# EAGLE board BBMiniPCB5x5-Quad (EAGLE 6.6.0)
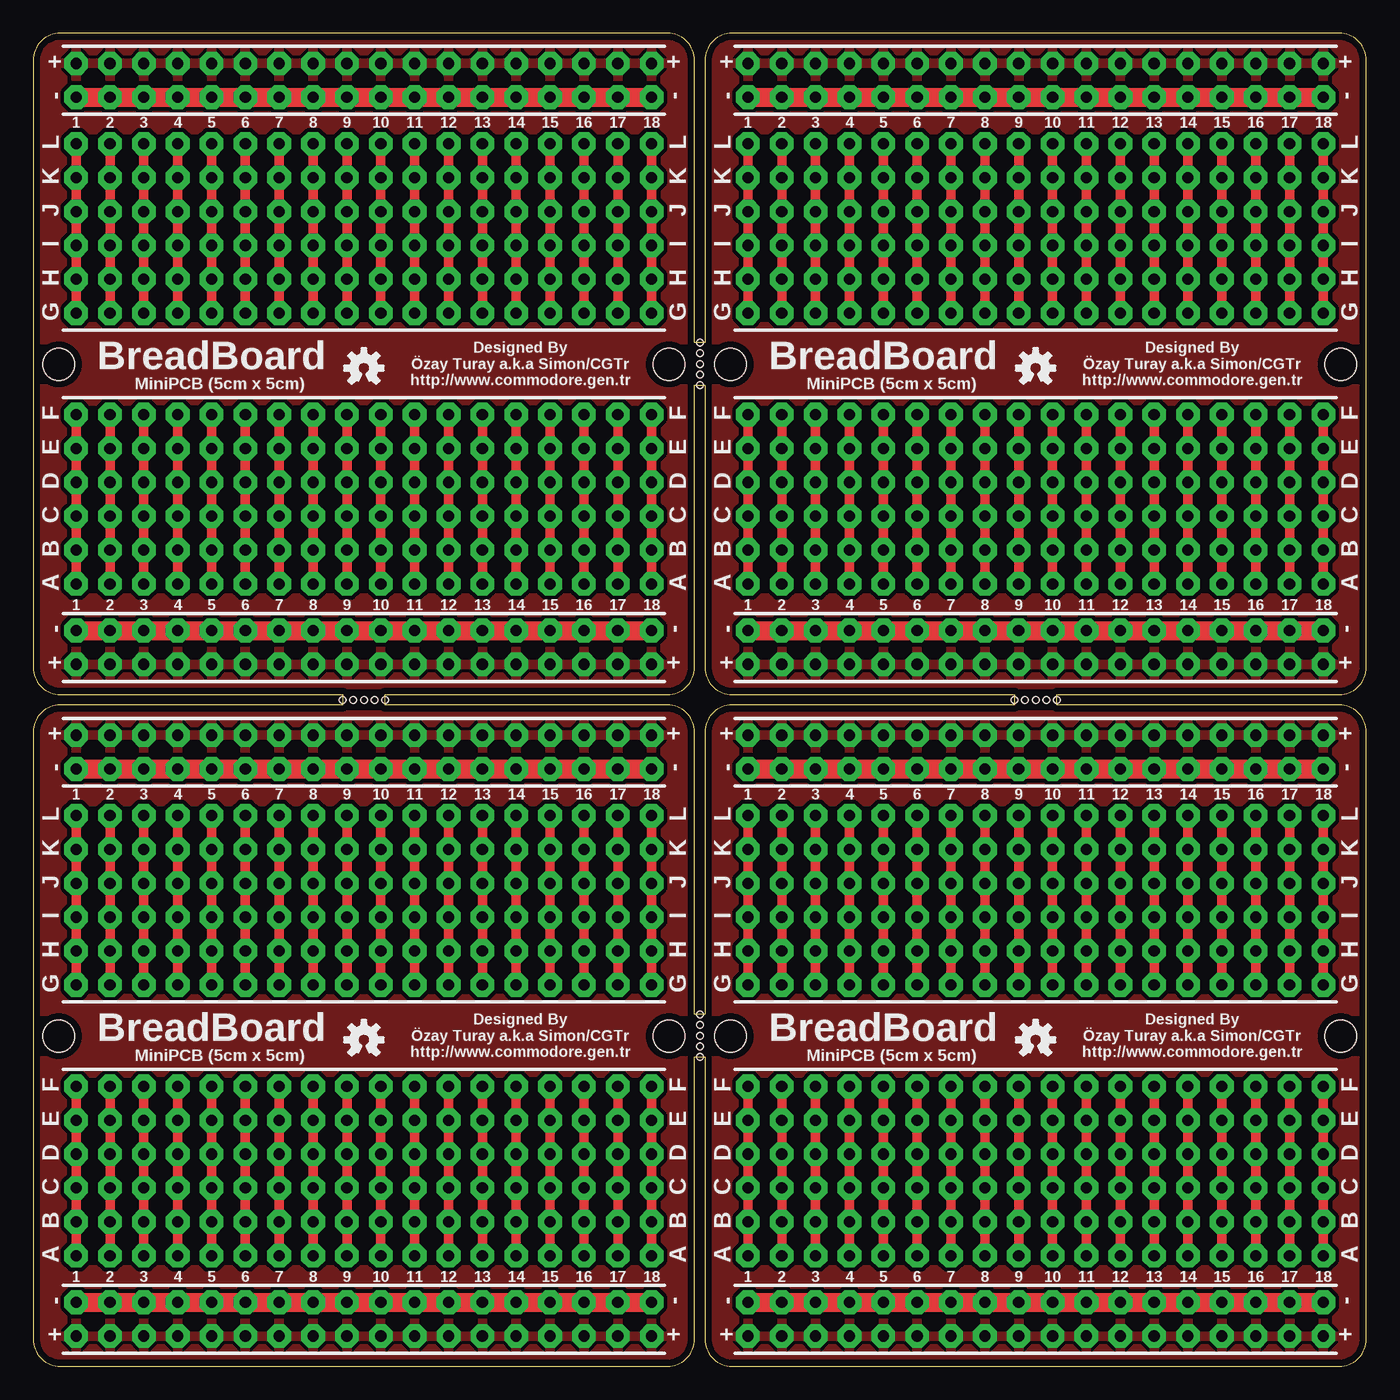
[diagram p0: board, top side]
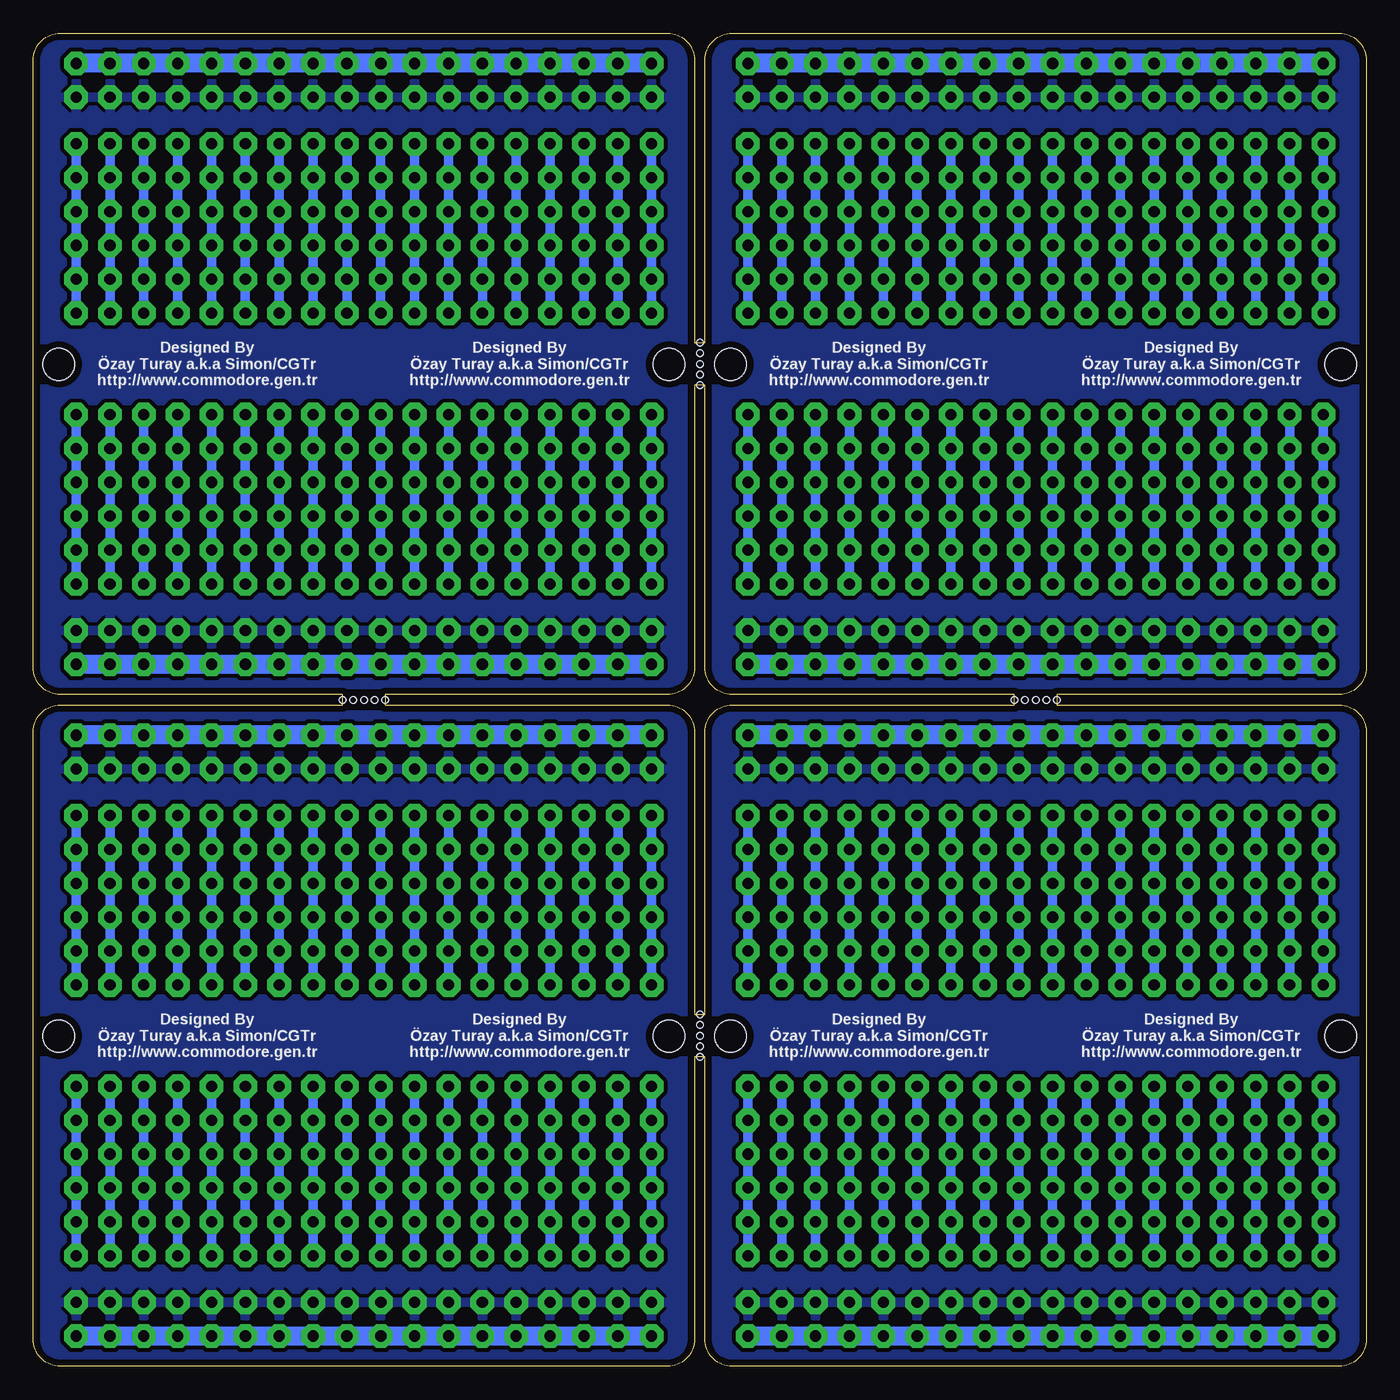
[diagram p1: board, bottom side, seen from below]

Size 100 x 100 mm. Coordinates in mm from the lower left corner, seen from the top.
Outline: 23.2,49.6 2,49.6 arc90 0,47.6 0,2 arc90 2,0 47.6,0 arc90 49.6,2 49.6,23.2 50.4,23.2 50.4,2 arc90 52.4,0 98,0 arc90 100,2 100,47.6 arc90 98,49.6 76.8,49.6 76.8,50.4 98,50.4 arc90 100,52.4 100,98 arc90 98,100 52.4,100 arc90 50.4,98 50.4,76.8 49.6,76.8 49.6,98 arc90 47.6,100 2,100 arc90 0,98 0,52.4 arc90 2,50.4 23.2,50.4 23.2,49.6
Outline: 49.6,26.4 49.6,47.6 arc90 47.6,49.6 26.4,49.6 26.4,50.4 47.6,50.4 arc90 49.6,52.4 49.6,73.6 50.4,73.6 50.4,52.4 arc90 52.4,50.4 73.6,50.4 73.6,49.6 52.4,49.6 arc90 50.4,47.6 50.4,26.4 49.6,26.4
Copper layers (1*16): Top 0.035mm / dielectric 1.6mm / Bottom 0.035mm
Design rules "Elecrow": minimum track width 6mil, minimum drill 12mil, track to track 6mil, track to pad 6mil, pad to pad 6mil, via to via 8mil, smd to smd 0mil, copper to edge 20mil, drill to drill 10mil, minimum pad ring 6mil, minimum via ring 6mil, stop-mask expansion 0mil, vias tented up to drill 100mil, thermal gap 10mil
Holes 0.5 mm at 50,26.4 23.2,50 24,50 73.6,50 50,76.8 24.8,50 25.6,50 26.4,50 50,25.6 50,24.8 50,24 50,23.2 50,76 50,75.2 50,74.4 50,73.6 74.4,50 75.2,50 76,50 76.8,50
Holes 2.4 mm at 1.91,24.77 47.7,24.77 52.3,24.77 98.09,24.77 1.91,75.17 47.7,75.17 52.3,75.17 98.09,75.17

## Footprints (pad centres in the part's own frame; a part is rotated, then mirrored left to right if it is on the bottom)
HDR_1X06_NOSILK = drill 0.838 pad 1.778 octagon: 1 0,0; 2 2.54,0; 3 5.08,0; 4 7.62,0; 5 10.16,0; 6 12.7,0
HDR_1X18_NOSILK = drill 0.838 pad 1.778 octagon: 1 0,0; 2 2.54,0; 3 5.08,0; 4 7.62,0; 5 10.16,0; 6 12.7,0; 7 15.24,0; 8 17.78,0; 9 20.32,0; 10 22.86,0; 11 25.4,0; 12 27.94,0; 13 30.48,0; 14 33.02,0; 15 35.56,0; 16 38.1,0; 17 40.64,0; 18 43.18,0

## Placement (x,y rotation side)
B1  1  [HDR_1X06_NOSILK]  3.21,8.29 90 top
B2  2  [HDR_1X06_NOSILK]  5.75,8.29 90 top
B3  3  [HDR_1X06_NOSILK]  8.29,8.29 90 top
B4  4  [HDR_1X06_NOSILK]  10.83,8.29 90 top
B5  5  [HDR_1X06_NOSILK]  13.37,8.29 90 top
B6  6  [HDR_1X06_NOSILK]  15.91,8.29 90 top
B7  7  [HDR_1X06_NOSILK]  18.45,8.29 90 top
B8  8  [HDR_1X06_NOSILK]  20.99,8.29 90 top
B9  9  [HDR_1X06_NOSILK]  23.53,8.29 90 top
B10  10  [HDR_1X06_NOSILK]  26.07,8.29 90 top
B11  11  [HDR_1X06_NOSILK]  28.61,8.29 90 top
B12  12  [HDR_1X06_NOSILK]  31.15,8.29 90 top
B13  13  [HDR_1X06_NOSILK]  33.69,8.29 90 top
B14  14  [HDR_1X06_NOSILK]  36.23,8.29 90 top
B15  15  [HDR_1X06_NOSILK]  38.77,8.29 90 top
B16  16  [HDR_1X06_NOSILK]  41.31,8.29 90 top
B17  17  [HDR_1X06_NOSILK]  43.85,8.29 90 top
B18  18  [HDR_1X06_NOSILK]  46.39,8.29 90 top
B19  1  [HDR_1X06_NOSILK]  53.61,8.29 90 top
B20  2  [HDR_1X06_NOSILK]  56.15,8.29 90 top
B21  3  [HDR_1X06_NOSILK]  58.69,8.29 90 top
B22  4  [HDR_1X06_NOSILK]  61.23,8.29 90 top
B23  5  [HDR_1X06_NOSILK]  63.77,8.29 90 top
B24  6  [HDR_1X06_NOSILK]  66.31,8.29 90 top
B25  7  [HDR_1X06_NOSILK]  68.85,8.29 90 top
B26  8  [HDR_1X06_NOSILK]  71.39,8.29 90 top
B27  9  [HDR_1X06_NOSILK]  73.93,8.29 90 top
B28  10  [HDR_1X06_NOSILK]  76.47,8.29 90 top
B29  11  [HDR_1X06_NOSILK]  79.01,8.29 90 top
B30  12  [HDR_1X06_NOSILK]  81.55,8.29 90 top
B31  13  [HDR_1X06_NOSILK]  84.09,8.29 90 top
B32  14  [HDR_1X06_NOSILK]  86.63,8.29 90 top
B33  15  [HDR_1X06_NOSILK]  89.17,8.29 90 top
B34  16  [HDR_1X06_NOSILK]  91.71,8.29 90 top
B35  17  [HDR_1X06_NOSILK]  94.25,8.29 90 top
B36  18  [HDR_1X06_NOSILK]  96.79,8.29 90 top
B37  1  [HDR_1X06_NOSILK]  3.21,58.69 90 top
B38  2  [HDR_1X06_NOSILK]  5.75,58.69 90 top
B39  3  [HDR_1X06_NOSILK]  8.29,58.69 90 top
B40  4  [HDR_1X06_NOSILK]  10.83,58.69 90 top
B41  5  [HDR_1X06_NOSILK]  13.37,58.69 90 top
B42  6  [HDR_1X06_NOSILK]  15.91,58.69 90 top
B43  7  [HDR_1X06_NOSILK]  18.45,58.69 90 top
B44  8  [HDR_1X06_NOSILK]  20.99,58.69 90 top
B45  9  [HDR_1X06_NOSILK]  23.53,58.69 90 top
B46  10  [HDR_1X06_NOSILK]  26.07,58.69 90 top
B47  11  [HDR_1X06_NOSILK]  28.61,58.69 90 top
B48  12  [HDR_1X06_NOSILK]  31.15,58.69 90 top
B49  13  [HDR_1X06_NOSILK]  33.69,58.69 90 top
B50  14  [HDR_1X06_NOSILK]  36.23,58.69 90 top
B51  15  [HDR_1X06_NOSILK]  38.77,58.69 90 top
B52  16  [HDR_1X06_NOSILK]  41.31,58.69 90 top
B53  17  [HDR_1X06_NOSILK]  43.85,58.69 90 top
B54  18  [HDR_1X06_NOSILK]  46.39,58.69 90 top
B55  1  [HDR_1X06_NOSILK]  53.61,58.69 90 top
B56  2  [HDR_1X06_NOSILK]  56.15,58.69 90 top
B57  3  [HDR_1X06_NOSILK]  58.69,58.69 90 top
B58  4  [HDR_1X06_NOSILK]  61.23,58.69 90 top
B59  5  [HDR_1X06_NOSILK]  63.77,58.69 90 top
B60  6  [HDR_1X06_NOSILK]  66.31,58.69 90 top
B61  7  [HDR_1X06_NOSILK]  68.85,58.69 90 top
B62  8  [HDR_1X06_NOSILK]  71.39,58.69 90 top
B63  9  [HDR_1X06_NOSILK]  73.93,58.69 90 top
B64  10  [HDR_1X06_NOSILK]  76.47,58.69 90 top
B65  11  [HDR_1X06_NOSILK]  79.01,58.69 90 top
B66  12  [HDR_1X06_NOSILK]  81.55,58.69 90 top
B67  13  [HDR_1X06_NOSILK]  84.09,58.69 90 top
B68  14  [HDR_1X06_NOSILK]  86.63,58.69 90 top
B69  15  [HDR_1X06_NOSILK]  89.17,58.69 90 top
B70  16  [HDR_1X06_NOSILK]  91.71,58.69 90 top
B71  17  [HDR_1X06_NOSILK]  94.25,58.69 90 top
B72  18  [HDR_1X06_NOSILK]  96.79,58.69 90 top
G1  -  [HDR_1X18_NOSILK]  3.21,4.8 0 top
G2  -  [HDR_1X18_NOSILK]  3.21,44.8 0 top
G3  -  [HDR_1X18_NOSILK]  53.61,4.8 0 top
G4  -  [HDR_1X18_NOSILK]  53.61,44.8 0 top
G5  -  [HDR_1X18_NOSILK]  3.21,55.2 0 top
G6  -  [HDR_1X18_NOSILK]  3.21,95.2 0 top
G7  -  [HDR_1X18_NOSILK]  53.61,55.2 0 top
G8  -  [HDR_1X18_NOSILK]  53.61,95.2 0 top
LOGO1  OSHW_LOGO_SMALL  [OSHW_LOGO_SMALL]  24.8,24.48 0 top
LOGO2  OSHW_LOGO_SMALL  [OSHW_LOGO_SMALL]  75.2,24.48 0 top
LOGO3  OSHW_LOGO_SMALL  [OSHW_LOGO_SMALL]  24.8,74.88 0 top
LOGO4  OSHW_LOGO_SMALL  [OSHW_LOGO_SMALL]  75.2,74.88 0 top
P1  +  [HDR_1X18_NOSILK]  3.21,2.26 0 top
P2  +  [HDR_1X18_NOSILK]  3.21,47.34 0 top
P3  +  [HDR_1X18_NOSILK]  53.61,2.26 0 top
P4  +  [HDR_1X18_NOSILK]  53.61,47.34 0 top
P5  +  [HDR_1X18_NOSILK]  3.21,52.66 0 top
P6  +  [HDR_1X18_NOSILK]  3.21,97.74 0 top
P7  +  [HDR_1X18_NOSILK]  53.61,52.66 0 top
P8  +  [HDR_1X18_NOSILK]  53.61,97.74 0 top
T1  1  [HDR_1X06_NOSILK]  3.21,41.31 270 top
T2  2  [HDR_1X06_NOSILK]  5.75,41.31 270 top
T3  3  [HDR_1X06_NOSILK]  8.29,41.31 270 top
T4  4  [HDR_1X06_NOSILK]  10.83,41.31 270 top
T5  5  [HDR_1X06_NOSILK]  13.37,41.31 270 top
T6  6  [HDR_1X06_NOSILK]  15.91,41.31 270 top
T7  7  [HDR_1X06_NOSILK]  18.45,41.31 270 top
T8  8  [HDR_1X06_NOSILK]  20.99,41.31 270 top
T9  9  [HDR_1X06_NOSILK]  23.53,41.31 270 top
T10  10  [HDR_1X06_NOSILK]  26.07,41.31 270 top
T11  11  [HDR_1X06_NOSILK]  28.61,41.31 270 top
T12  12  [HDR_1X06_NOSILK]  31.15,41.31 270 top
T13  13  [HDR_1X06_NOSILK]  33.69,41.31 270 top
T14  14  [HDR_1X06_NOSILK]  36.23,41.31 270 top
T15  15  [HDR_1X06_NOSILK]  38.77,41.31 270 top
T16  16  [HDR_1X06_NOSILK]  41.31,41.31 270 top
T17  17  [HDR_1X06_NOSILK]  43.85,41.31 270 top
T18  18  [HDR_1X06_NOSILK]  46.39,41.31 270 top
T19  1  [HDR_1X06_NOSILK]  53.61,41.31 270 top
T20  2  [HDR_1X06_NOSILK]  56.15,41.31 270 top
T21  3  [HDR_1X06_NOSILK]  58.69,41.31 270 top
T22  4  [HDR_1X06_NOSILK]  61.23,41.31 270 top
T23  5  [HDR_1X06_NOSILK]  63.77,41.31 270 top
T24  6  [HDR_1X06_NOSILK]  66.31,41.31 270 top
T25  7  [HDR_1X06_NOSILK]  68.85,41.31 270 top
T26  8  [HDR_1X06_NOSILK]  71.39,41.31 270 top
T27  9  [HDR_1X06_NOSILK]  73.93,41.31 270 top
T28  10  [HDR_1X06_NOSILK]  76.47,41.31 270 top
T29  11  [HDR_1X06_NOSILK]  79.01,41.31 270 top
T30  12  [HDR_1X06_NOSILK]  81.55,41.31 270 top
T31  13  [HDR_1X06_NOSILK]  84.09,41.31 270 top
T32  14  [HDR_1X06_NOSILK]  86.63,41.31 270 top
T33  15  [HDR_1X06_NOSILK]  89.17,41.31 270 top
T34  16  [HDR_1X06_NOSILK]  91.71,41.31 270 top
T35  17  [HDR_1X06_NOSILK]  94.25,41.31 270 top
T36  18  [HDR_1X06_NOSILK]  96.79,41.31 270 top
T37  1  [HDR_1X06_NOSILK]  3.21,91.71 270 top
T38  2  [HDR_1X06_NOSILK]  5.75,91.71 270 top
T39  3  [HDR_1X06_NOSILK]  8.29,91.71 270 top
T40  4  [HDR_1X06_NOSILK]  10.83,91.71 270 top
T41  5  [HDR_1X06_NOSILK]  13.37,91.71 270 top
T42  6  [HDR_1X06_NOSILK]  15.91,91.71 270 top
T43  7  [HDR_1X06_NOSILK]  18.45,91.71 270 top
T44  8  [HDR_1X06_NOSILK]  20.99,91.71 270 top
T45  9  [HDR_1X06_NOSILK]  23.53,91.71 270 top
T46  10  [HDR_1X06_NOSILK]  26.07,91.71 270 top
T47  11  [HDR_1X06_NOSILK]  28.61,91.71 270 top
T48  12  [HDR_1X06_NOSILK]  31.15,91.71 270 top
T49  13  [HDR_1X06_NOSILK]  33.69,91.71 270 top
T50  14  [HDR_1X06_NOSILK]  36.23,91.71 270 top
T51  15  [HDR_1X06_NOSILK]  38.77,91.71 270 top
T52  16  [HDR_1X06_NOSILK]  41.31,91.71 270 top
T53  17  [HDR_1X06_NOSILK]  43.85,91.71 270 top
T54  18  [HDR_1X06_NOSILK]  46.39,91.71 270 top
T55  1  [HDR_1X06_NOSILK]  53.61,91.71 270 top
T56  2  [HDR_1X06_NOSILK]  56.15,91.71 270 top
T57  3  [HDR_1X06_NOSILK]  58.69,91.71 270 top
T58  4  [HDR_1X06_NOSILK]  61.23,91.71 270 top
T59  5  [HDR_1X06_NOSILK]  63.77,91.71 270 top
T60  6  [HDR_1X06_NOSILK]  66.31,91.71 270 top
T61  7  [HDR_1X06_NOSILK]  68.85,91.71 270 top
T62  8  [HDR_1X06_NOSILK]  71.39,91.71 270 top
T63  9  [HDR_1X06_NOSILK]  73.93,91.71 270 top
T64  10  [HDR_1X06_NOSILK]  76.47,91.71 270 top
T65  11  [HDR_1X06_NOSILK]  79.01,91.71 270 top
T66  12  [HDR_1X06_NOSILK]  81.55,91.71 270 top
T67  13  [HDR_1X06_NOSILK]  84.09,91.71 270 top
T68  14  [HDR_1X06_NOSILK]  86.63,91.71 270 top
T69  15  [HDR_1X06_NOSILK]  89.17,91.71 270 top
T70  16  [HDR_1X06_NOSILK]  91.71,91.71 270 top
T71  17  [HDR_1X06_NOSILK]  94.25,91.71 270 top
T72  18  [HDR_1X06_NOSILK]  96.79,91.71 270 top

## Library data of the parts
B1-B72 G1-G8 P1-P8 T1-T72 = sj_connectors
LOGO1-LOGO4 = sj_standart

## Nets
B1: B1.1 B1.2 B1.3 B1.4 B1.5 B1.6
B2: B2.1 B2.2 B2.3 B2.4 B2.5 B2.6
B3: B3.1 B3.2 B3.3 B3.4 B3.5 B3.6
B4: B4.1 B4.2 B4.3 B4.4 B4.5 B4.6
B5: B5.1 B5.2 B5.3 B5.4 B5.5 B5.6
B6: B6.1 B6.2 B6.3 B6.4 B6.5 B6.6
B7: B7.1 B7.2 B7.3 B7.4 B7.5 B7.6
B8: B8.1 B8.2 B8.3 B8.4 B8.5 B8.6
B9: B9.1 B9.2 B9.3 B9.4 B9.5 B9.6
B10: B10.1 B10.2 B10.3 B10.4 B10.5 B10.6
B11: B11.1 B11.2 B11.3 B11.4 B11.5 B11.6
B12: B12.1 B12.2 B12.3 B12.4 B12.5 B12.6
B13: B13.1 B13.2 B13.3 B13.4 B13.5 B13.6
B14: B14.1 B14.2 B14.3 B14.4 B14.5 B14.6
B15: B15.1 B15.2 B15.3 B15.4 B15.5 B15.6
B16: B16.1 B16.2 B16.3 B16.4 B16.5 B16.6
B17: B17.1 B17.2 B17.3 B17.4 B17.5 B17.6
B18: B18.1 B18.2 B18.3 B18.4 B18.5 B18.6
B19: B19.1 B19.2 B19.3 B19.4 B19.5 B19.6
B20: B20.1 B20.2 B20.3 B20.4 B20.5 B20.6
B21: B21.1 B21.2 B21.3 B21.4 B21.5 B21.6
B22: B22.1 B22.2 B22.3 B22.4 B22.5 B22.6
B23: B23.1 B23.2 B23.3 B23.4 B23.5 B23.6
B24: B24.1 B24.2 B24.3 B24.4 B24.5 B24.6
B25: B25.1 B25.2 B25.3 B25.4 B25.5 B25.6
B26: B26.1 B26.2 B26.3 B26.4 B26.5 B26.6
B27: B27.1 B27.2 B27.3 B27.4 B27.5 B27.6
B28: B28.1 B28.2 B28.3 B28.4 B28.5 B28.6
B29: B29.1 B29.2 B29.3 B29.4 B29.5 B29.6
B30: B30.1 B30.2 B30.3 B30.4 B30.5 B30.6
B31: B31.1 B31.2 B31.3 B31.4 B31.5 B31.6
B32: B32.1 B32.2 B32.3 B32.4 B32.5 B32.6
B33: B33.1 B33.2 B33.3 B33.4 B33.5 B33.6
B34: B34.1 B34.2 B34.3 B34.4 B34.5 B34.6
B35: B35.1 B35.2 B35.3 B35.4 B35.5 B35.6
B36: B36.1 B36.2 B36.3 B36.4 B36.5 B36.6
B37: B37.1 B37.2 B37.3 B37.4 B37.5 B37.6
B38: B38.1 B38.2 B38.3 B38.4 B38.5 B38.6
B39: B39.1 B39.2 B39.3 B39.4 B39.5 B39.6
B40: B40.1 B40.2 B40.3 B40.4 B40.5 B40.6
B41: B41.1 B41.2 B41.3 B41.4 B41.5 B41.6
B42: B42.1 B42.2 B42.3 B42.4 B42.5 B42.6
B43: B43.1 B43.2 B43.3 B43.4 B43.5 B43.6
B44: B44.1 B44.2 B44.3 B44.4 B44.5 B44.6
B45: B45.1 B45.2 B45.3 B45.4 B45.5 B45.6
B46: B46.1 B46.2 B46.3 B46.4 B46.5 B46.6
B47: B47.1 B47.2 B47.3 B47.4 B47.5 B47.6
B48: B48.1 B48.2 B48.3 B48.4 B48.5 B48.6
B49: B49.1 B49.2 B49.3 B49.4 B49.5 B49.6
B50: B50.1 B50.2 B50.3 B50.4 B50.5 B50.6
B51: B51.1 B51.2 B51.3 B51.4 B51.5 B51.6
B52: B52.1 B52.2 B52.3 B52.4 B52.5 B52.6
B53: B53.1 B53.2 B53.3 B53.4 B53.5 B53.6
B54: B54.1 B54.2 B54.3 B54.4 B54.5 B54.6
B55: B55.1 B55.2 B55.3 B55.4 B55.5 B55.6
B56: B56.1 B56.2 B56.3 B56.4 B56.5 B56.6
B57: B57.1 B57.2 B57.3 B57.4 B57.5 B57.6
B58: B58.1 B58.2 B58.3 B58.4 B58.5 B58.6
B59: B59.1 B59.2 B59.3 B59.4 B59.5 B59.6
B60: B60.1 B60.2 B60.3 B60.4 B60.5 B60.6
B61: B61.1 B61.2 B61.3 B61.4 B61.5 B61.6
B62: B62.1 B62.2 B62.3 B62.4 B62.5 B62.6
B63: B63.1 B63.2 B63.3 B63.4 B63.5 B63.6
B64: B64.1 B64.2 B64.3 B64.4 B64.5 B64.6
B65: B65.1 B65.2 B65.3 B65.4 B65.5 B65.6
B66: B66.1 B66.2 B66.3 B66.4 B66.5 B66.6
B67: B67.1 B67.2 B67.3 B67.4 B67.5 B67.6
B68: B68.1 B68.2 B68.3 B68.4 B68.5 B68.6
B69: B69.1 B69.2 B69.3 B69.4 B69.5 B69.6
B70: B70.1 B70.2 B70.3 B70.4 B70.5 B70.6
B71: B71.1 B71.2 B71.3 B71.4 B71.5 B71.6
B72: B72.1 B72.2 B72.3 B72.4 B72.5 B72.6
GND: G1.1 G1.2 G1.3 G1.4 G1.5 G1.6 G1.7 G1.8 G1.9 G1.10 G1.11 G1.12 G1.13 G1.14 G1.15 G1.16 G1.17 G1.18 G2.1 G2.2 G2.3 G2.4 G2.5 G2.6 G2.7 G2.8 G2.9 G2.10 G2.11 G2.12 G2.13 G2.14 G2.15 G2.16 G2.17 G2.18
GND1: G3.1 G3.2 G3.3 G3.4 G3.5 G3.6 G3.7 G3.8 G3.9 G3.10 G3.11 G3.12 G3.13 G3.14 G3.15 G3.16 G3.17 G3.18 G4.1 G4.2 G4.3 G4.4 G4.5 G4.6 G4.7 G4.8 G4.9 G4.10 G4.11 G4.12 G4.13 G4.14 G4.15 G4.16 G4.17 G4.18
GND2: G5.1 G5.2 G5.3 G5.4 G5.5 G5.6 G5.7 G5.8 G5.9 G5.10 G5.11 G5.12 G5.13 G5.14 G5.15 G5.16 G5.17 G5.18 G6.1 G6.2 G6.3 G6.4 G6.5 G6.6 G6.7 G6.8 G6.9 G6.10 G6.11 G6.12 G6.13 G6.14 G6.15 G6.16 G6.17 G6.18
GND3: G7.1 G7.2 G7.3 G7.4 G7.5 G7.6 G7.7 G7.8 G7.9 G7.10 G7.11 G7.12 G7.13 G7.14 G7.15 G7.16 G7.17 G7.18 G8.1 G8.2 G8.3 G8.4 G8.5 G8.6 G8.7 G8.8 G8.9 G8.10 G8.11 G8.12 G8.13 G8.14 G8.15 G8.16 G8.17 G8.18
T1: T1.1 T1.2 T1.3 T1.4 T1.5 T1.6
T2: T2.1 T2.2 T2.3 T2.4 T2.5 T2.6
T3: T3.1 T3.2 T3.3 T3.4 T3.5 T3.6
T4: T4.1 T4.2 T4.3 T4.4 T4.5 T4.6
T5: T5.1 T5.2 T5.3 T5.4 T5.5 T5.6
T6: T6.1 T6.2 T6.3 T6.4 T6.5 T6.6
T7: T7.1 T7.2 T7.3 T7.4 T7.5 T7.6
T8: T8.1 T8.2 T8.3 T8.4 T8.5 T8.6
T9: T9.1 T9.2 T9.3 T9.4 T9.5 T9.6
T10: T10.1 T10.2 T10.3 T10.4 T10.5 T10.6
T11: T11.1 T11.2 T11.3 T11.4 T11.5 T11.6
T12: T12.1 T12.2 T12.3 T12.4 T12.5 T12.6
T13: T13.1 T13.2 T13.3 T13.4 T13.5 T13.6
T14: T14.1 T14.2 T14.3 T14.4 T14.5 T14.6
T15: T15.1 T15.2 T15.3 T15.4 T15.5 T15.6
T16: T16.1 T16.2 T16.3 T16.4 T16.5 T16.6
T17: T17.1 T17.2 T17.3 T17.4 T17.5 T17.6
T18: T18.1 T18.2 T18.3 T18.4 T18.5 T18.6
T19: T19.1 T19.2 T19.3 T19.4 T19.5 T19.6
T20: T20.1 T20.2 T20.3 T20.4 T20.5 T20.6
T21: T21.1 T21.2 T21.3 T21.4 T21.5 T21.6
T22: T22.1 T22.2 T22.3 T22.4 T22.5 T22.6
T23: T23.1 T23.2 T23.3 T23.4 T23.5 T23.6
T24: T24.1 T24.2 T24.3 T24.4 T24.5 T24.6
T25: T25.1 T25.2 T25.3 T25.4 T25.5 T25.6
T26: T26.1 T26.2 T26.3 T26.4 T26.5 T26.6
T27: T27.1 T27.2 T27.3 T27.4 T27.5 T27.6
T28: T28.1 T28.2 T28.3 T28.4 T28.5 T28.6
T29: T29.1 T29.2 T29.3 T29.4 T29.5 T29.6
T30: T30.1 T30.2 T30.3 T30.4 T30.5 T30.6
T31: T31.1 T31.2 T31.3 T31.4 T31.5 T31.6
T32: T32.1 T32.2 T32.3 T32.4 T32.5 T32.6
T33: T33.1 T33.2 T33.3 T33.4 T33.5 T33.6
T34: T34.1 T34.2 T34.3 T34.4 T34.5 T34.6
T35: T35.1 T35.2 T35.3 T35.4 T35.5 T35.6
T36: T36.1 T36.2 T36.3 T36.4 T36.5 T36.6
T37: T37.1 T37.2 T37.3 T37.4 T37.5 T37.6
T38: T38.1 T38.2 T38.3 T38.4 T38.5 T38.6
T39: T39.1 T39.2 T39.3 T39.4 T39.5 T39.6
T40: T40.1 T40.2 T40.3 T40.4 T40.5 T40.6
T41: T41.1 T41.2 T41.3 T41.4 T41.5 T41.6
T42: T42.1 T42.2 T42.3 T42.4 T42.5 T42.6
T43: T43.1 T43.2 T43.3 T43.4 T43.5 T43.6
T44: T44.1 T44.2 T44.3 T44.4 T44.5 T44.6
T45: T45.1 T45.2 T45.3 T45.4 T45.5 T45.6
T46: T46.1 T46.2 T46.3 T46.4 T46.5 T46.6
T47: T47.1 T47.2 T47.3 T47.4 T47.5 T47.6
T48: T48.1 T48.2 T48.3 T48.4 T48.5 T48.6
T49: T49.1 T49.2 T49.3 T49.4 T49.5 T49.6
T50: T50.1 T50.2 T50.3 T50.4 T50.5 T50.6
T51: T51.1 T51.2 T51.3 T51.4 T51.5 T51.6
T52: T52.1 T52.2 T52.3 T52.4 T52.5 T52.6
T53: T53.1 T53.2 T53.3 T53.4 T53.5 T53.6
T54: T54.1 T54.2 T54.3 T54.4 T54.5 T54.6
T55: T55.1 T55.2 T55.3 T55.4 T55.5 T55.6
T56: T56.1 T56.2 T56.3 T56.4 T56.5 T56.6
T57: T57.1 T57.2 T57.3 T57.4 T57.5 T57.6
T58: T58.1 T58.2 T58.3 T58.4 T58.5 T58.6
T59: T59.1 T59.2 T59.3 T59.4 T59.5 T59.6
T60: T60.1 T60.2 T60.3 T60.4 T60.5 T60.6
T61: T61.1 T61.2 T61.3 T61.4 T61.5 T61.6
T62: T62.1 T62.2 T62.3 T62.4 T62.5 T62.6
T63: T63.1 T63.2 T63.3 T63.4 T63.5 T63.6
T64: T64.1 T64.2 T64.3 T64.4 T64.5 T64.6
T65: T65.1 T65.2 T65.3 T65.4 T65.5 T65.6
T66: T66.1 T66.2 T66.3 T66.4 T66.5 T66.6
T67: T67.1 T67.2 T67.3 T67.4 T67.5 T67.6
T68: T68.1 T68.2 T68.3 T68.4 T68.5 T68.6
T69: T69.1 T69.2 T69.3 T69.4 T69.5 T69.6
T70: T70.1 T70.2 T70.3 T70.4 T70.5 T70.6
T71: T71.1 T71.2 T71.3 T71.4 T71.5 T71.6
T72: T72.1 T72.2 T72.3 T72.4 T72.5 T72.6
VCC: P1.1 P1.2 P1.3 P1.4 P1.5 P1.6 P1.7 P1.8 P1.9 P1.10 P1.11 P1.12 P1.13 P1.14 P1.15 P1.16 P1.17 P1.18 P2.1 P2.2 P2.3 P2.4 P2.5 P2.6 P2.7 P2.8 P2.9 P2.10 P2.11 P2.12 P2.13 P2.14 P2.15 P2.16 P2.17 P2.18
VCC1: P3.1 P3.2 P3.3 P3.4 P3.5 P3.6 P3.7 P3.8 P3.9 P3.10 P3.11 P3.12 P3.13 P3.14 P3.15 P3.16 P3.17 P3.18 P4.1 P4.2 P4.3 P4.4 P4.5 P4.6 P4.7 P4.8 P4.9 P4.10 P4.11 P4.12 P4.13 P4.14 P4.15 P4.16 P4.17 P4.18
VCC2: P5.1 P5.2 P5.3 P5.4 P5.5 P5.6 P5.7 P5.8 P5.9 P5.10 P5.11 P5.12 P5.13 P5.14 P5.15 P5.16 P5.17 P5.18 P6.1 P6.2 P6.3 P6.4 P6.5 P6.6 P6.7 P6.8 P6.9 P6.10 P6.11 P6.12 P6.13 P6.14 P6.15 P6.16 P6.17 P6.18
VCC3: P7.1 P7.2 P7.3 P7.4 P7.5 P7.6 P7.7 P7.8 P7.9 P7.10 P7.11 P7.12 P7.13 P7.14 P7.15 P7.16 P7.17 P7.18 P8.1 P8.2 P8.3 P8.4 P8.5 P8.6 P8.7 P8.8 P8.9 P8.10 P8.11 P8.12 P8.13 P8.14 P8.15 P8.16 P8.17 P8.18

## Tracks (layer width: path | path; a pad name or v marks a point on that pad's centre or on a via)
B1
  Top 0.711: B1.6 B1.5 B1.4 B1.3 B1.2 B1.1
  Bottom 0.711: B1.1 B1.6
B2
  Top 0.711: B2.6 B2.5 B2.4 B2.3 B2.2 B2.1
  Bottom 0.711: B2.1 B2.6
B3
  Top 0.711: B3.6 B3.5 B3.4 B3.3 B3.2 B3.1
  Bottom 0.711: B3.1 B3.6
B4
  Top 0.711: B4.6 B4.5 B4.4 B4.3 B4.2 B4.1
  Bottom 0.711: B4.1 B4.6
B5
  Top 0.711: B5.6 B5.5 B5.4 B5.3 B5.2 B5.1
  Bottom 0.711: B5.1 B5.6
B6
  Top 0.711: B6.6 B6.5 B6.4 B6.3 B6.2 B6.1
  Bottom 0.711: B6.1 B6.6
B7
  Top 0.711: B7.6 B7.5 B7.4 B7.3 B7.2 B7.1
  Bottom 0.711: B7.1 B7.6
B8
  Top 0.711: B8.6 B8.5 B8.4 B8.3 B8.2 B8.1
  Bottom 0.711: B8.1 B8.6
B9
  Top 0.711: B9.6 B9.5 B9.4 B9.3 B9.2 B9.1
  Bottom 0.711: B9.1 B9.6
B10
  Top 0.711: B10.6 B10.5 B10.4 B10.3 B10.2 B10.1
  Bottom 0.711: B10.1 B10.6
B11
  Top 0.711: B11.6 B11.5 B11.4 B11.3 B11.2 B11.1
  Bottom 0.711: B11.6 B11.1
B12
  Top 0.711: B12.6 B12.5 B12.4 B12.3 B12.2 B12.1
  Bottom 0.711: B12.6 B12.1
B13
  Top 0.711: B13.6 B13.5 B13.4 B13.3 B13.2 B13.1
  Bottom 0.711: B13.6 B13.1
B14
  Top 0.711: B14.6 B14.5 B14.4 B14.3 B14.2 B14.1
  Bottom 0.711: B14.6 B14.1
B15
  Top 0.711: B15.6 B15.5 B15.4 B15.3 B15.2 B15.1
  Bottom 0.711: B15.6 B15.1
B16
  Top 0.711: B16.6 B16.5 B16.4 B16.3 B16.2 B16.1
  Bottom 0.711: B16.6 B16.1
B17
  Top 0.711: B17.6 B17.5 B17.4 B17.3 B17.2 B17.1
  Bottom 0.711: B17.6 B17.1
B18
  Top 0.711: B18.6 B18.5 B18.4 B18.3 B18.2 B18.1
  Bottom 0.711: B18.6 B18.1
B19
  Top 0.711: B19.6 B19.5 B19.4 B19.3 B19.2 B19.1
  Bottom 0.711: B19.1 B19.6
B20
  Top 0.711: B20.6 B20.5 B20.4 B20.3 B20.2 B20.1
  Bottom 0.711: B20.1 B20.6
B21
  Top 0.711: B21.6 B21.5 B21.4 B21.3 B21.2 B21.1
  Bottom 0.711: B21.1 B21.6
B22
  Top 0.711: B22.6 B22.5 B22.4 B22.3 B22.2 B22.1
  Bottom 0.711: B22.1 B22.6
B23
  Top 0.711: B23.6 B23.5 B23.4 B23.3 B23.2 B23.1
  Bottom 0.711: B23.1 B23.6
B24
  Top 0.711: B24.6 B24.5 B24.4 B24.3 B24.2 B24.1
  Bottom 0.711: B24.1 B24.6
B25
  Top 0.711: B25.6 B25.5 B25.4 B25.3 B25.2 B25.1
  Bottom 0.711: B25.1 B25.6
B26
  Top 0.711: B26.6 B26.5 B26.4 B26.3 B26.2 B26.1
  Bottom 0.711: B26.1 B26.6
B27
  Top 0.711: B27.6 B27.5 B27.4 B27.3 B27.2 B27.1
  Bottom 0.711: B27.1 B27.6
B28
  Top 0.711: B28.6 B28.5 B28.4 B28.3 B28.2 B28.1
  Bottom 0.711: B28.1 B28.6
B29
  Top 0.711: B29.6 B29.5 B29.4 B29.3 B29.2 B29.1
  Bottom 0.711: B29.6 B29.1
B30
  Top 0.711: B30.6 B30.5 B30.4 B30.3 B30.2 B30.1
  Bottom 0.711: B30.6 B30.1
B31
  Top 0.711: B31.6 B31.5 B31.4 B31.3 B31.2 B31.1
  Bottom 0.711: B31.6 B31.1
B32
  Top 0.711: B32.6 B32.5 B32.4 B32.3 B32.2 B32.1
  Bottom 0.711: B32.6 B32.1
B33
  Top 0.711: B33.6 B33.5 B33.4 B33.3 B33.2 B33.1
  Bottom 0.711: B33.6 B33.1
B34
  Top 0.711: B34.6 B34.5 B34.4 B34.3 B34.2 B34.1
  Bottom 0.711: B34.6 B34.1
B35
  Top 0.711: B35.6 B35.5 B35.4 B35.3 B35.2 B35.1
  Bottom 0.711: B35.6 B35.1
B36
  Top 0.711: B36.6 B36.5 B36.4 B36.3 B36.2 B36.1
  Bottom 0.711: B36.6 B36.1
B37
  Top 0.711: B37.6 B37.5 B37.4 B37.3 B37.2 B37.1
  Bottom 0.711: B37.1 B37.6
B38
  Top 0.711: B38.6 B38.5 B38.4 B38.3 B38.2 B38.1
  Bottom 0.711: B38.1 B38.6
B39
  Top 0.711: B39.6 B39.5 B39.4 B39.3 B39.2 B39.1
  Bottom 0.711: B39.1 B39.6
B40
  Top 0.711: B40.6 B40.5 B40.4 B40.3 B40.2 B40.1
  Bottom 0.711: B40.1 B40.6
B41
  Top 0.711: B41.6 B41.5 B41.4 B41.3 B41.2 B41.1
  Bottom 0.711: B41.1 B41.6
B42
  Top 0.711: B42.6 B42.5 B42.4 B42.3 B42.2 B42.1
  Bottom 0.711: B42.1 B42.6
B43
  Top 0.711: B43.6 B43.5 B43.4 B43.3 B43.2 B43.1
  Bottom 0.711: B43.1 B43.6
B44
  Top 0.711: B44.6 B44.5 B44.4 B44.3 B44.2 B44.1
  Bottom 0.711: B44.1 B44.6
B45
  Top 0.711: B45.6 B45.5 B45.4 B45.3 B45.2 B45.1
  Bottom 0.711: B45.1 B45.6
B46
  Top 0.711: B46.6 B46.5 B46.4 B46.3 B46.2 B46.1
  Bottom 0.711: B46.1 B46.6
B47
  Top 0.711: B47.6 B47.5 B47.4 B47.3 B47.2 B47.1
  Bottom 0.711: B47.6 B47.1
B48
  Top 0.711: B48.6 B48.5 B48.4 B48.3 B48.2 B48.1
  Bottom 0.711: B48.6 B48.1
B49
  Top 0.711: B49.6 B49.5 B49.4 B49.3 B49.2 B49.1
  Bottom 0.711: B49.6 B49.1
B50
  Top 0.711: B50.6 B50.5 B50.4 B50.3 B50.2 B50.1
  Bottom 0.711: B50.6 B50.1
B51
  Top 0.711: B51.6 B51.5 B51.4 B51.3 B51.2 B51.1
  Bottom 0.711: B51.6 B51.1
B52
  Top 0.711: B52.6 B52.5 B52.4 B52.3 B52.2 B52.1
  Bottom 0.711: B52.6 B52.1
B53
  Top 0.711: B53.6 B53.5 B53.4 B53.3 B53.2 B53.1
  Bottom 0.711: B53.6 B53.1
B54
  Top 0.711: B54.6 B54.5 B54.4 B54.3 B54.2 B54.1
  Bottom 0.711: B54.6 B54.1
B55
  Top 0.711: B55.6 B55.5 B55.4 B55.3 B55.2 B55.1
  Bottom 0.711: B55.1 B55.6
B56
  Top 0.711: B56.6 B56.5 B56.4 B56.3 B56.2 B56.1
  Bottom 0.711: B56.1 B56.6
B57
  Top 0.711: B57.6 B57.5 B57.4 B57.3 B57.2 B57.1
  Bottom 0.711: B57.1 B57.6
B58
  Top 0.711: B58.6 B58.5 B58.4 B58.3 B58.2 B58.1
  Bottom 0.711: B58.1 B58.6
B59
  Top 0.711: B59.6 B59.5 B59.4 B59.3 B59.2 B59.1
  Bottom 0.711: B59.1 B59.6
B60
  Top 0.711: B60.6 B60.5 B60.4 B60.3 B60.2 B60.1
  Bottom 0.711: B60.1 B60.6
B61
  Top 0.711: B61.6 B61.5 B61.4 B61.3 B61.2 B61.1
  Bottom 0.711: B61.1 B61.6
B62
  Top 0.711: B62.6 B62.5 B62.4 B62.3 B62.2 B62.1
  Bottom 0.711: B62.1 B62.6
B63
  Top 0.711: B63.6 B63.5 B63.4 B63.3 B63.2 B63.1
  Bottom 0.711: B63.1 B63.6
B64
  Top 0.711: B64.6 B64.5 B64.4 B64.3 B64.2 B64.1
  Bottom 0.711: B64.1 B64.6
B65
  Top 0.711: B65.6 B65.5 B65.4 B65.3 B65.2 B65.1
  Bottom 0.711: B65.6 B65.1
B66
  Top 0.711: B66.6 B66.5 B66.4 B66.3 B66.2 B66.1
  Bottom 0.711: B66.6 B66.1
B67
  Top 0.711: B67.6 B67.5 B67.4 B67.3 B67.2 B67.1
  Bottom 0.711: B67.6 B67.1
B68
  Top 0.711: B68.6 B68.5 B68.4 B68.3 B68.2 B68.1
  Bottom 0.711: B68.6 B68.1
B69
  Top 0.711: B69.6 B69.5 B69.4 B69.3 B69.2 B69.1
  Bottom 0.711: B69.6 B69.1
B70
  Top 0.711: B70.6 B70.5 B70.4 B70.3 B70.2 B70.1
  Bottom 0.711: B70.6 B70.1
B71
  Top 0.711: B71.6 B71.5 B71.4 B71.3 B71.2 B71.1
  Bottom 0.711: B71.6 B71.1
B72
  Top 0.711: B72.6 B72.5 B72.4 B72.3 B72.2 B72.1
  Bottom 0.711: B72.6 B72.1
GND
  Top 0.813: 46.44,44.8 46.44,44.84 | 46.44,4.8 46.44,4.83
  Top 1.422: G2.1 46.44,44.8 | G1.1 46.44,4.8
  pour Bottom (isolate 0.305): 0.04,49.63 0.04,0.04 49.63,0.04 49.63,49.63
GND1
  Top 0.813: 96.83,44.8 96.83,44.84 | 96.83,4.8 96.83,4.83
  Top 1.422: G4.1 96.83,44.8 | G3.1 96.83,4.8
  pour Bottom (isolate 0.305): 50.44,49.63 50.44,0.04 100.03,0.04 100.03,49.63
GND2
  Top 0.813: 46.44,95.2 46.44,95.23 | 46.44,55.2 46.44,55.23
  Top 1.422: G6.1 46.44,95.2 | G5.1 46.44,55.2
  pour Bottom (isolate 0.305): 0.04,100.03 0.04,50.44 49.63,50.44 49.63,100.03
GND3
  Top 0.813: 96.83,95.2 96.83,95.23 | 96.83,55.2 96.83,55.23
  Top 1.422: G8.1 96.83,95.2 | G7.1 96.83,55.2
  pour Bottom (isolate 0.305): 50.44,100.03 50.44,50.44 100.03,50.44 100.03,100.03
T1
  Top 0.711: T1.1 T1.2 T1.3 T1.4 T1.5 T1.6
  Bottom 0.711: T1.1 T1.6
T2
  Top 0.711: T2.1 T2.2 T2.3 T2.4 T2.5 T2.6
  Bottom 0.711: T2.1 T2.6
T3
  Top 0.711: T3.1 T3.2 T3.3 T3.4 T3.5 T3.6
  Bottom 0.711: T3.1 T3.6
T4
  Top 0.711: T4.1 T4.2 T4.3 T4.4 T4.5 T4.6
  Bottom 0.711: T4.1 T4.6
T5
  Top 0.711: T5.1 T5.2 T5.3 T5.4 T5.5 T5.6
  Bottom 0.711: T5.1 T5.6
T6
  Top 0.711: T6.1 T6.2 T6.3 T6.4 T6.5 T6.6
  Bottom 0.711: T6.1 T6.6
T7
  Top 0.711: T7.1 T7.2 T7.3 T7.4 T7.5 T7.6
  Bottom 0.711: T7.1 T7.6
T8
  Top 0.711: T8.1 T8.2 T8.3 T8.4 T8.5 T8.6
  Bottom 0.711: T8.1 T8.6
T9
  Top 0.711: T9.1 T9.2 T9.3 T9.4 T9.5 T9.6
  Bottom 0.711: T9.1 T9.6
T10
  Top 0.711: T10.1 T10.2 T10.3 T10.4 T10.5 T10.6
  Bottom 0.711: T10.1 T10.6
T11
  Top 0.711: T11.1 T11.2 T11.3 T11.4 T11.5 T11.6
  Bottom 0.711: T11.1 T11.6
T12
  Top 0.711: T12.1 T12.2 T12.3 T12.4 T12.5 T12.6
  Bottom 0.711: T12.1 T12.6
T13
  Top 0.711: T13.1 T13.2 T13.3 T13.4 T13.5 T13.6
  Bottom 0.711: T13.1 T13.6
T14
  Top 0.711: T14.1 T14.2 T14.3 T14.4 T14.5 T14.6
  Bottom 0.711: T14.1 T14.6
T15
  Top 0.711: T15.1 T15.2 T15.3 T15.4 T15.5 T15.6
  Bottom 0.711: T15.1 T15.6
T16
  Top 0.711: T16.1 T16.2 T16.3 T16.4 T16.5 T16.6
  Bottom 0.711: T16.1 T16.6
T17
  Top 0.711: T17.1 T17.2 T17.3 T17.4 T17.5 T17.6
  Bottom 0.711: T17.1 T17.6
T18
  Top 0.711: T18.1 T18.2 T18.3 T18.4 T18.5 T18.6
  Bottom 0.711: T18.1 T18.6
T19
  Top 0.711: T19.1 T19.2 T19.3 T19.4 T19.5 T19.6
  Bottom 0.711: T19.1 T19.6
T20
  Top 0.711: T20.1 T20.2 T20.3 T20.4 T20.5 T20.6
  Bottom 0.711: T20.1 T20.6
T21
  Top 0.711: T21.1 T21.2 T21.3 T21.4 T21.5 T21.6
  Bottom 0.711: T21.1 T21.6
T22
  Top 0.711: T22.1 T22.2 T22.3 T22.4 T22.5 T22.6
  Bottom 0.711: T22.1 T22.6
T23
  Top 0.711: T23.1 T23.2 T23.3 T23.4 T23.5 T23.6
  Bottom 0.711: T23.1 T23.6
T24
  Top 0.711: T24.1 T24.2 T24.3 T24.4 T24.5 T24.6
  Bottom 0.711: T24.1 T24.6
T25
  Top 0.711: T25.1 T25.2 T25.3 T25.4 T25.5 T25.6
  Bottom 0.711: T25.1 T25.6
T26
  Top 0.711: T26.1 T26.2 T26.3 T26.4 T26.5 T26.6
  Bottom 0.711: T26.1 T26.6
T27
  Top 0.711: T27.1 T27.2 T27.3 T27.4 T27.5 T27.6
  Bottom 0.711: T27.1 T27.6
T28
  Top 0.711: T28.1 T28.2 T28.3 T28.4 T28.5 T28.6
  Bottom 0.711: T28.1 T28.6
T29
  Top 0.711: T29.1 T29.2 T29.3 T29.4 T29.5 T29.6
  Bottom 0.711: T29.1 T29.6
T30
  Top 0.711: T30.1 T30.2 T30.3 T30.4 T30.5 T30.6
  Bottom 0.711: T30.1 T30.6
T31
  Top 0.711: T31.1 T31.2 T31.3 T31.4 T31.5 T31.6
  Bottom 0.711: T31.1 T31.6
T32
  Top 0.711: T32.1 T32.2 T32.3 T32.4 T32.5 T32.6
  Bottom 0.711: T32.1 T32.6
T33
  Top 0.711: T33.1 T33.2 T33.3 T33.4 T33.5 T33.6
  Bottom 0.711: T33.1 T33.6
T34
  Top 0.711: T34.1 T34.2 T34.3 T34.4 T34.5 T34.6
  Bottom 0.711: T34.1 T34.6
T35
  Top 0.711: T35.1 T35.2 T35.3 T35.4 T35.5 T35.6
  Bottom 0.711: T35.1 T35.6
T36
  Top 0.711: T36.1 T36.2 T36.3 T36.4 T36.5 T36.6
  Bottom 0.711: T36.1 T36.6
T37
  Top 0.711: T37.1 T37.2 T37.3 T37.4 T37.5 T37.6
  Bottom 0.711: T37.1 T37.6
T38
  Top 0.711: T38.1 T38.2 T38.3 T38.4 T38.5 T38.6
  Bottom 0.711: T38.1 T38.6
T39
  Top 0.711: T39.1 T39.2 T39.3 T39.4 T39.5 T39.6
  Bottom 0.711: T39.1 T39.6
T40
  Top 0.711: T40.1 T40.2 T40.3 T40.4 T40.5 T40.6
  Bottom 0.711: T40.1 T40.6
T41
  Top 0.711: T41.1 T41.2 T41.3 T41.4 T41.5 T41.6
  Bottom 0.711: T41.1 T41.6
T42
  Top 0.711: T42.1 T42.2 T42.3 T42.4 T42.5 T42.6
  Bottom 0.711: T42.1 T42.6
T43
  Top 0.711: T43.1 T43.2 T43.3 T43.4 T43.5 T43.6
  Bottom 0.711: T43.1 T43.6
T44
  Top 0.711: T44.1 T44.2 T44.3 T44.4 T44.5 T44.6
  Bottom 0.711: T44.1 T44.6
T45
  Top 0.711: T45.1 T45.2 T45.3 T45.4 T45.5 T45.6
  Bottom 0.711: T45.1 T45.6
T46
  Top 0.711: T46.1 T46.2 T46.3 T46.4 T46.5 T46.6
  Bottom 0.711: T46.1 T46.6
T47
  Top 0.711: T47.1 T47.2 T47.3 T47.4 T47.5 T47.6
  Bottom 0.711: T47.1 T47.6
T48
  Top 0.711: T48.1 T48.2 T48.3 T48.4 T48.5 T48.6
  Bottom 0.711: T48.1 T48.6
T49
  Top 0.711: T49.1 T49.2 T49.3 T49.4 T49.5 T49.6
  Bottom 0.711: T49.1 T49.6
T50
  Top 0.711: T50.1 T50.2 T50.3 T50.4 T50.5 T50.6
  Bottom 0.711: T50.1 T50.6
T51
  Top 0.711: T51.1 T51.2 T51.3 T51.4 T51.5 T51.6
  Bottom 0.711: T51.1 T51.6
T52
  Top 0.711: T52.1 T52.2 T52.3 T52.4 T52.5 T52.6
  Bottom 0.711: T52.1 T52.6
T53
  Top 0.711: T53.1 T53.2 T53.3 T53.4 T53.5 T53.6
  Bottom 0.711: T53.1 T53.6
T54
  Top 0.711: T54.1 T54.2 T54.3 T54.4 T54.5 T54.6
  Bottom 0.711: T54.1 T54.6
T55
  Top 0.711: T55.1 T55.2 T55.3 T55.4 T55.5 T55.6
  Bottom 0.711: T55.1 T55.6
T56
  Top 0.711: T56.1 T56.2 T56.3 T56.4 T56.5 T56.6
  Bottom 0.711: T56.1 T56.6
T57
  Top 0.711: T57.1 T57.2 T57.3 T57.4 T57.5 T57.6
  Bottom 0.711: T57.1 T57.6
T58
  Top 0.711: T58.1 T58.2 T58.3 T58.4 T58.5 T58.6
  Bottom 0.711: T58.1 T58.6
T59
  Top 0.711: T59.1 T59.2 T59.3 T59.4 T59.5 T59.6
  Bottom 0.711: T59.1 T59.6
T60
  Top 0.711: T60.1 T60.2 T60.3 T60.4 T60.5 T60.6
  Bottom 0.711: T60.1 T60.6
T61
  Top 0.711: T61.1 T61.2 T61.3 T61.4 T61.5 T61.6
  Bottom 0.711: T61.1 T61.6
T62
  Top 0.711: T62.1 T62.2 T62.3 T62.4 T62.5 T62.6
  Bottom 0.711: T62.1 T62.6
T63
  Top 0.711: T63.1 T63.2 T63.3 T63.4 T63.5 T63.6
  Bottom 0.711: T63.1 T63.6
T64
  Top 0.711: T64.1 T64.2 T64.3 T64.4 T64.5 T64.6
  Bottom 0.711: T64.1 T64.6
T65
  Top 0.711: T65.1 T65.2 T65.3 T65.4 T65.5 T65.6
  Bottom 0.711: T65.1 T65.6
T66
  Top 0.711: T66.1 T66.2 T66.3 T66.4 T66.5 T66.6
  Bottom 0.711: T66.1 T66.6
T67
  Top 0.711: T67.1 T67.2 T67.3 T67.4 T67.5 T67.6
  Bottom 0.711: T67.1 T67.6
T68
  Top 0.711: T68.1 T68.2 T68.3 T68.4 T68.5 T68.6
  Bottom 0.711: T68.1 T68.6
T69
  Top 0.711: T69.1 T69.2 T69.3 T69.4 T69.5 T69.6
  Bottom 0.711: T69.1 T69.6
T70
  Top 0.711: T70.1 T70.2 T70.3 T70.4 T70.5 T70.6
  Bottom 0.711: T70.1 T70.6
T71
  Top 0.711: T71.1 T71.2 T71.3 T71.4 T71.5 T71.6
  Bottom 0.711: T71.1 T71.6
T72
  Top 0.711: T72.1 T72.2 T72.3 T72.4 T72.5 T72.6
  Bottom 0.711: T72.1 T72.6
VCC
  Bottom 1.422: P2.1 P2.18 | P1.1 P1.18
  pour Top (isolate 0.305): 0.04,49.63 0.04,0.04 49.63,0.04 49.63,49.63
VCC1
  Bottom 1.422: P4.1 P4.18 | P3.1 P3.18
  pour Top (isolate 0.305): 50.44,49.63 50.44,0.04 100.03,0.04 100.03,49.63
VCC2
  Bottom 1.422: P6.1 P6.18 | P5.1 P5.18
  pour Top (isolate 0.305): 0.04,100.03 0.04,50.44 49.63,50.44 49.63,100.03
VCC3
  Bottom 1.422: P8.1 P8.18 | P7.1 P7.18
  pour Top (isolate 0.305): 50.44,100.03 50.44,50.44 100.03,50.44 100.03,100.03

## Text on the board
tPlace: + | + | - | - | L | L | L | L | K | K | K | K | J | J | J | J | I | I | I | I | H | H | H | H | G | G | G | G | BreadBoard | BreadBoard | Designed By / Özay Turay a.k.a Simon/CGTr / http://www.commodore.gen.tr | Designed By / Özay Turay a.k.a Simon/CGTr / http://www.commodore.gen.tr | MiniPCB (5cm x 5cm) | MiniPCB (5cm x 5cm) | F | F | F | F | E | E | E | E | D | D | D | D | C | C | C | C | B | B | B | B | A | A | A | A | - | - | + | + | + | + | - | - | L | L | L | L | K | K | K | K | J | J | J | J | I | I | I | I | H | H | H | H | G | G | G | G | BreadBoard | Designed By / Özay Turay a.k.a Simon/CGTr / http://www.commodore.gen.tr | BreadBoard | Designed By / Özay Turay a.k.a Simon/CGTr / http://www.commodore.gen.tr | MiniPCB (5cm x 5cm) | MiniPCB (5cm x 5cm) | F | F | F | F | E | E | E | E | D | D | D | D | C | C | C | C | B | B | B | B | A | A | A | A | - | - | + | +
bPlace: Designed By / Özay Turay a.k.a Simon/CGTr / http://www.commodore.gen.tr | Designed By / Özay Turay a.k.a Simon/CGTr / http://www.commodore.gen.tr | Designed By / Özay Turay a.k.a Simon/CGTr / http://www.commodore.gen.tr | Designed By / Özay Turay a.k.a Simon/CGTr / http://www.commodore.gen.tr | Designed By / Özay Turay a.k.a Simon/CGTr / http://www.commodore.gen.tr | Designed By / Özay Turay a.k.a Simon/CGTr / http://www.commodore.gen.tr | Designed By / Özay Turay a.k.a Simon/CGTr / http://www.commodore.gen.tr | Designed By / Özay Turay a.k.a Simon/CGTr / http://www.commodore.gen.tr